# Altium PCB pcb.PcbDoc
Units mm, origin at the board's own origin, x right, y up, seen from the top; angles counter-clockwise.
Board outline 100 x 100 mm, 2 copper layers (Top Layer, Bottom Layer); 16 components, 18 nets, 108 pads, 20 vias.
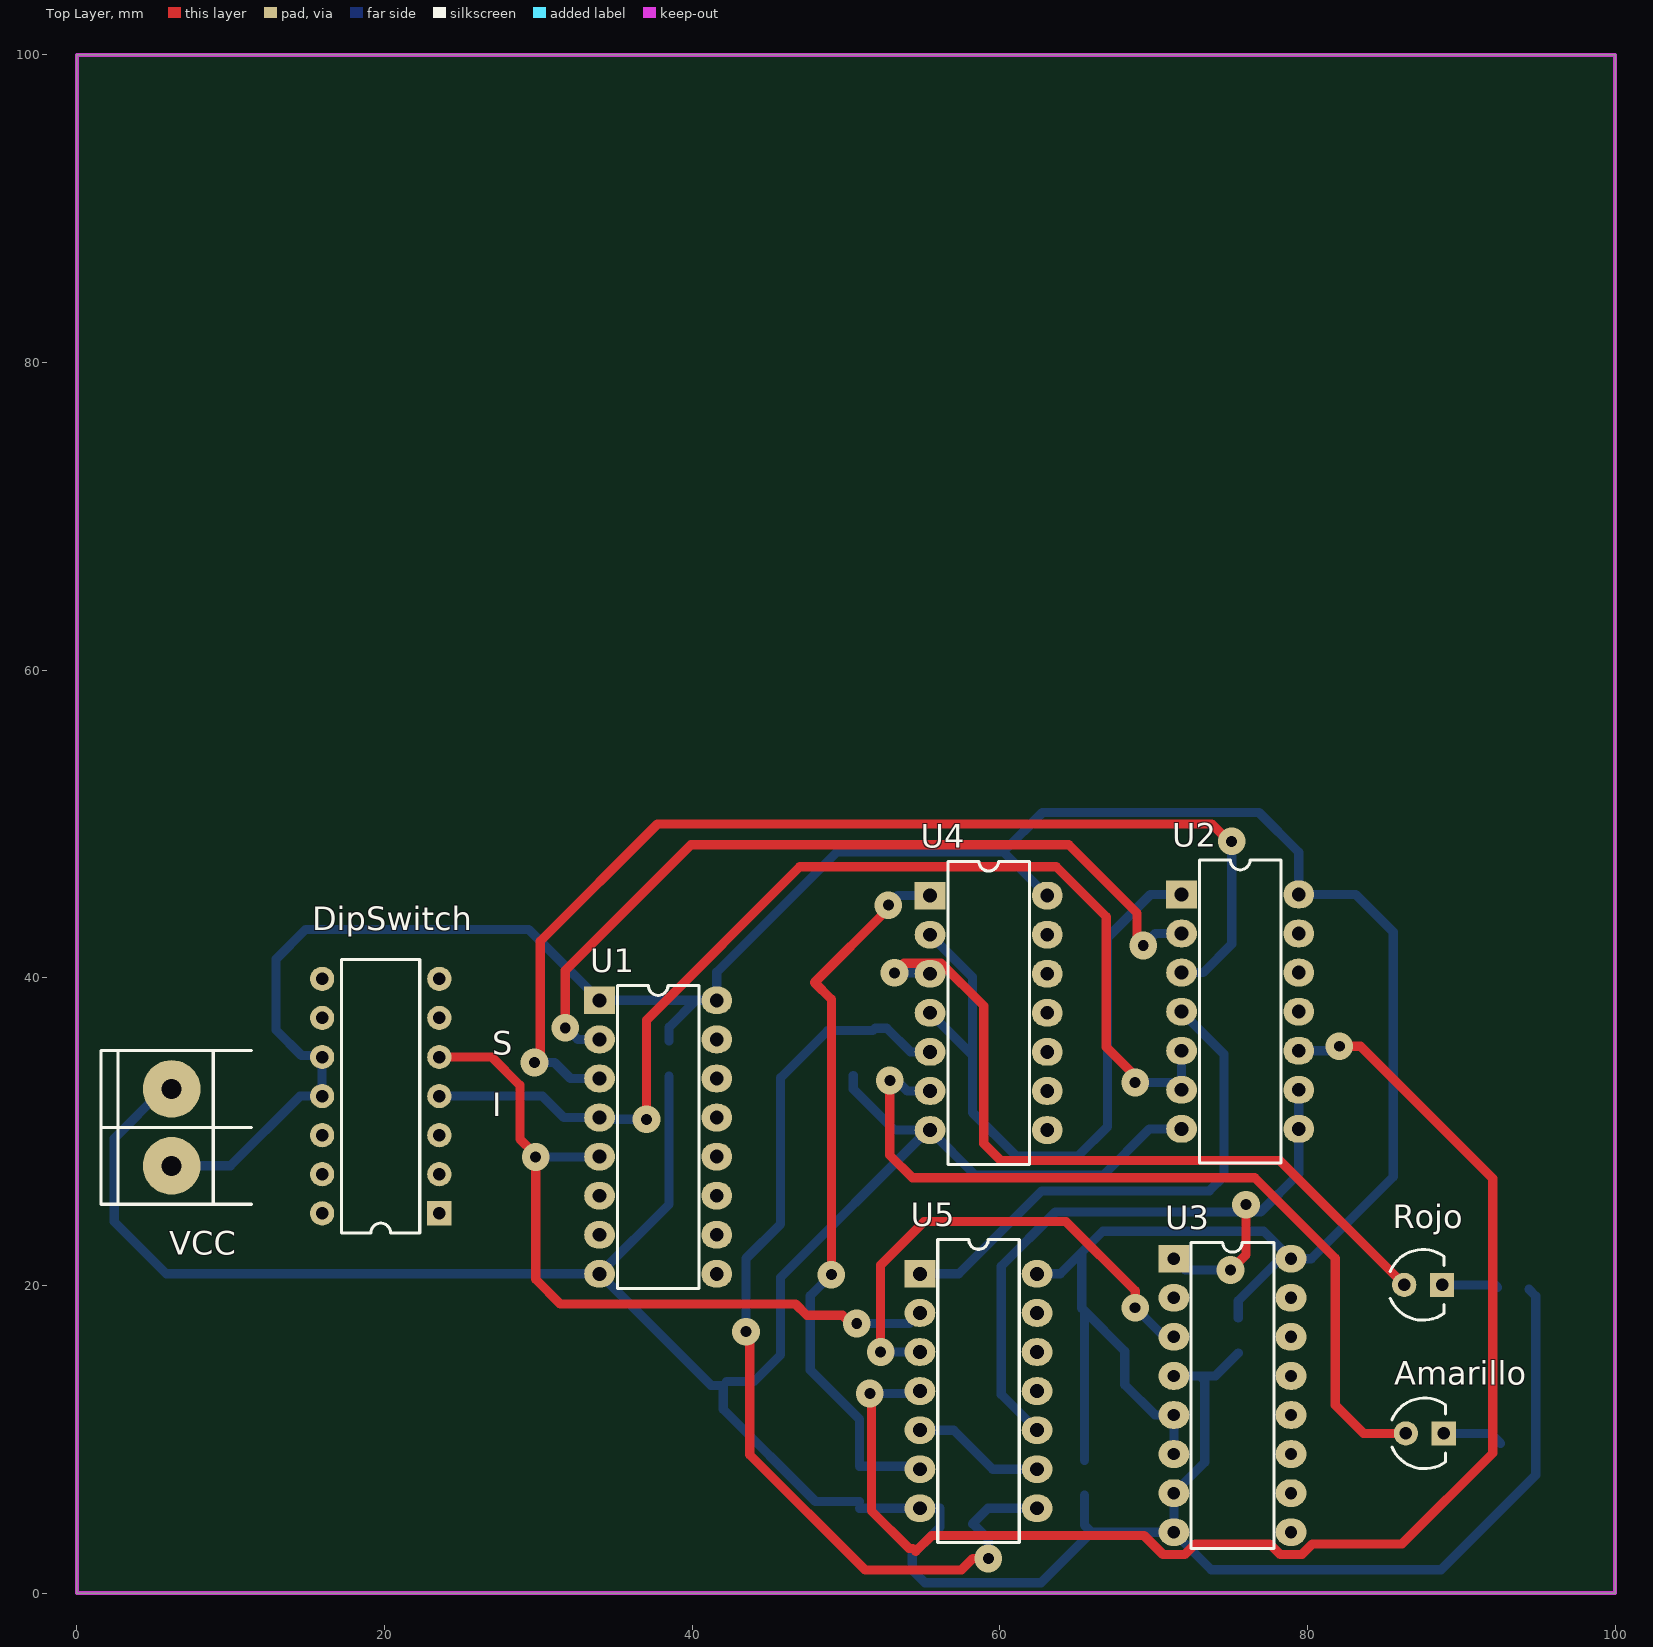
[diagram p0: Top Layer view]
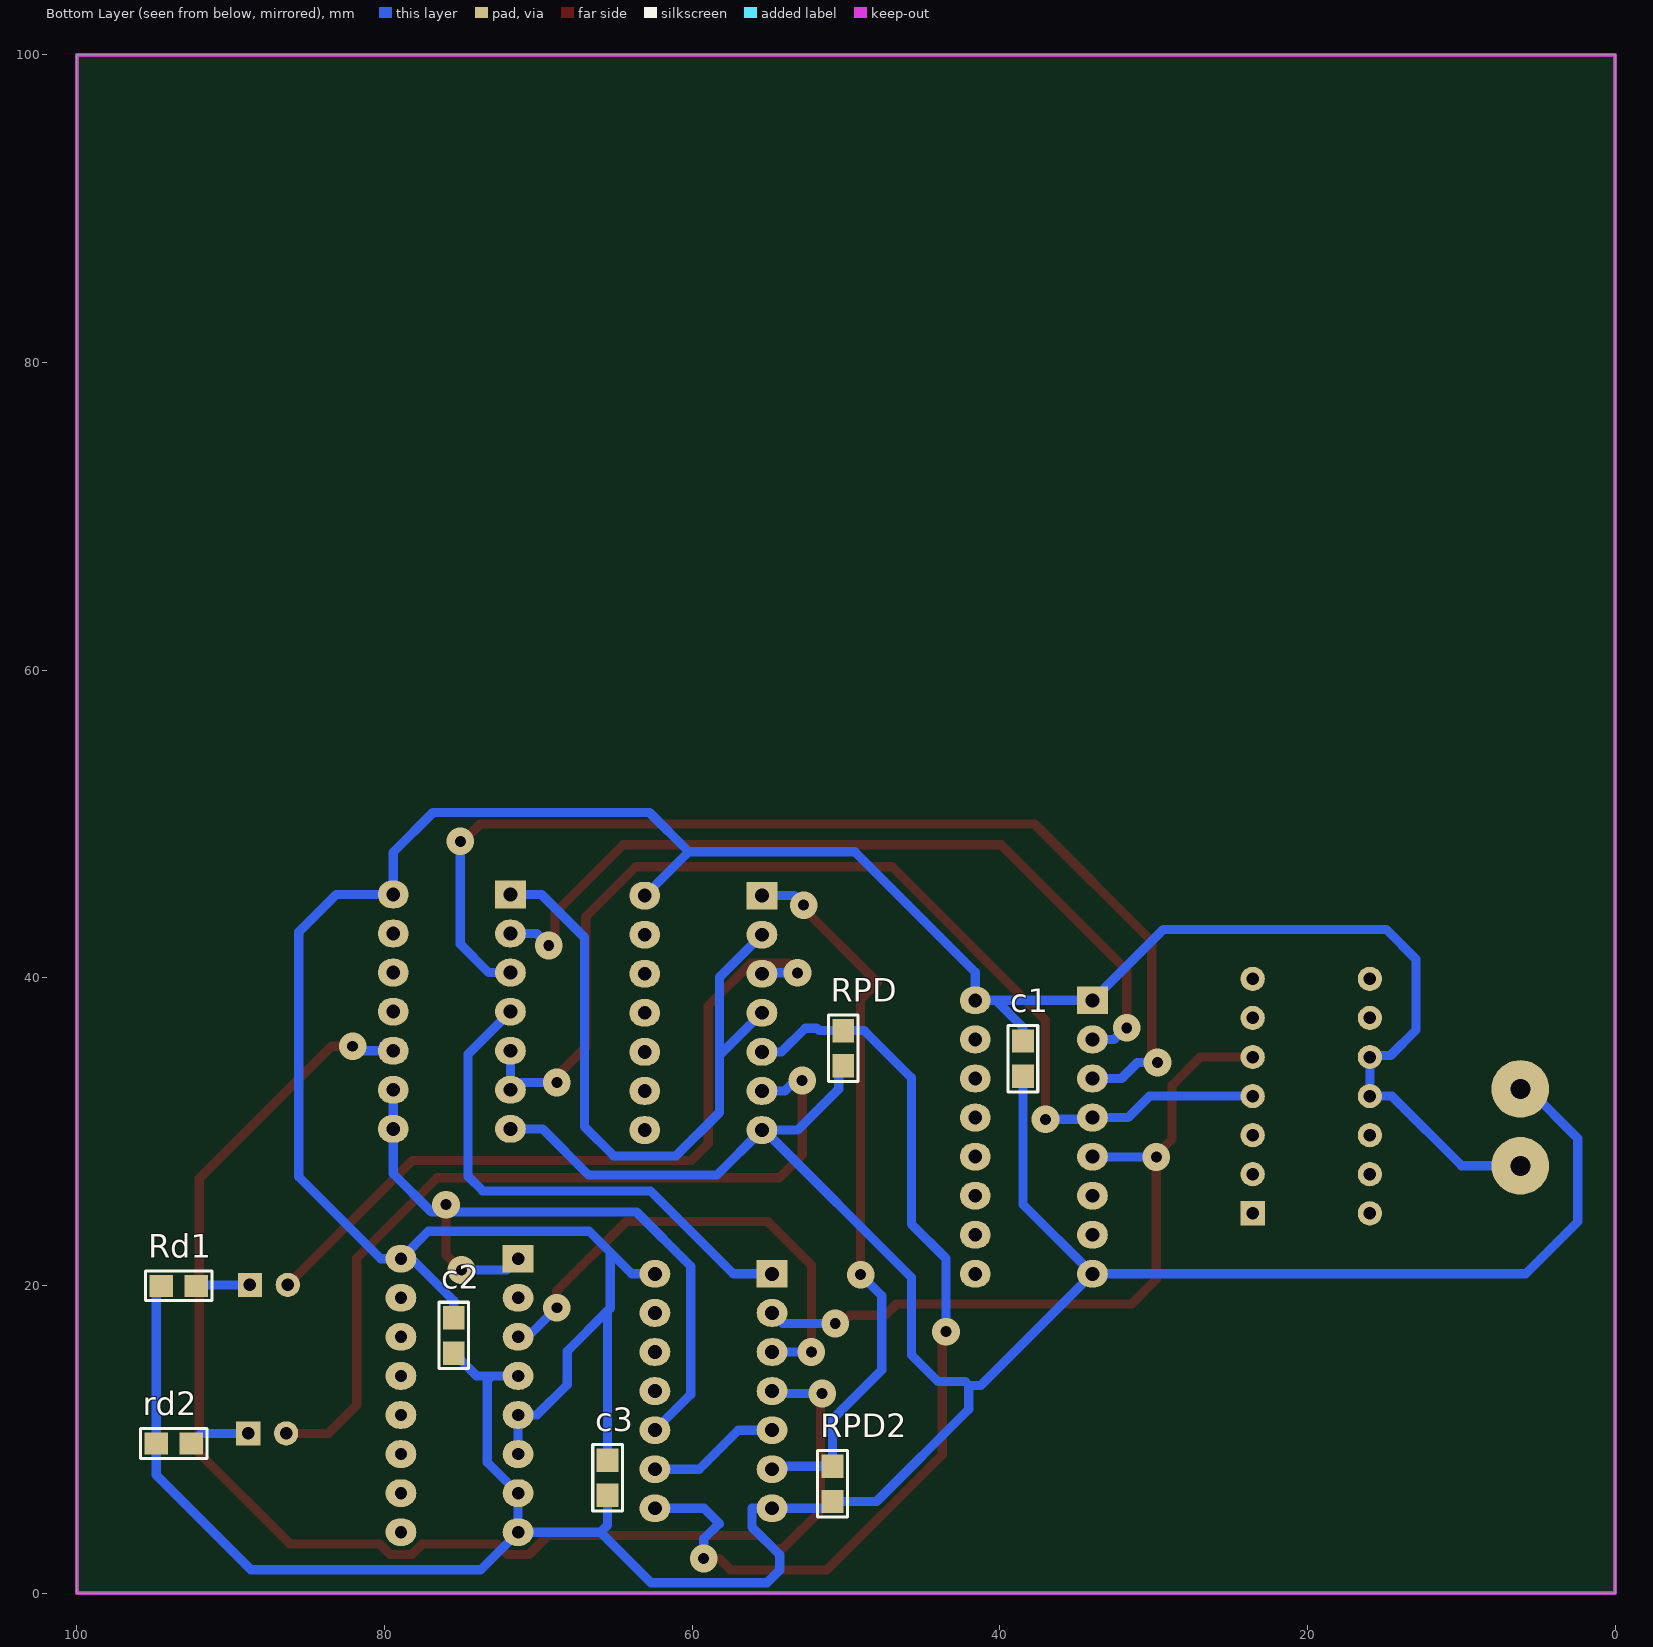
[diagram p1: Bottom Layer view, seen from below]
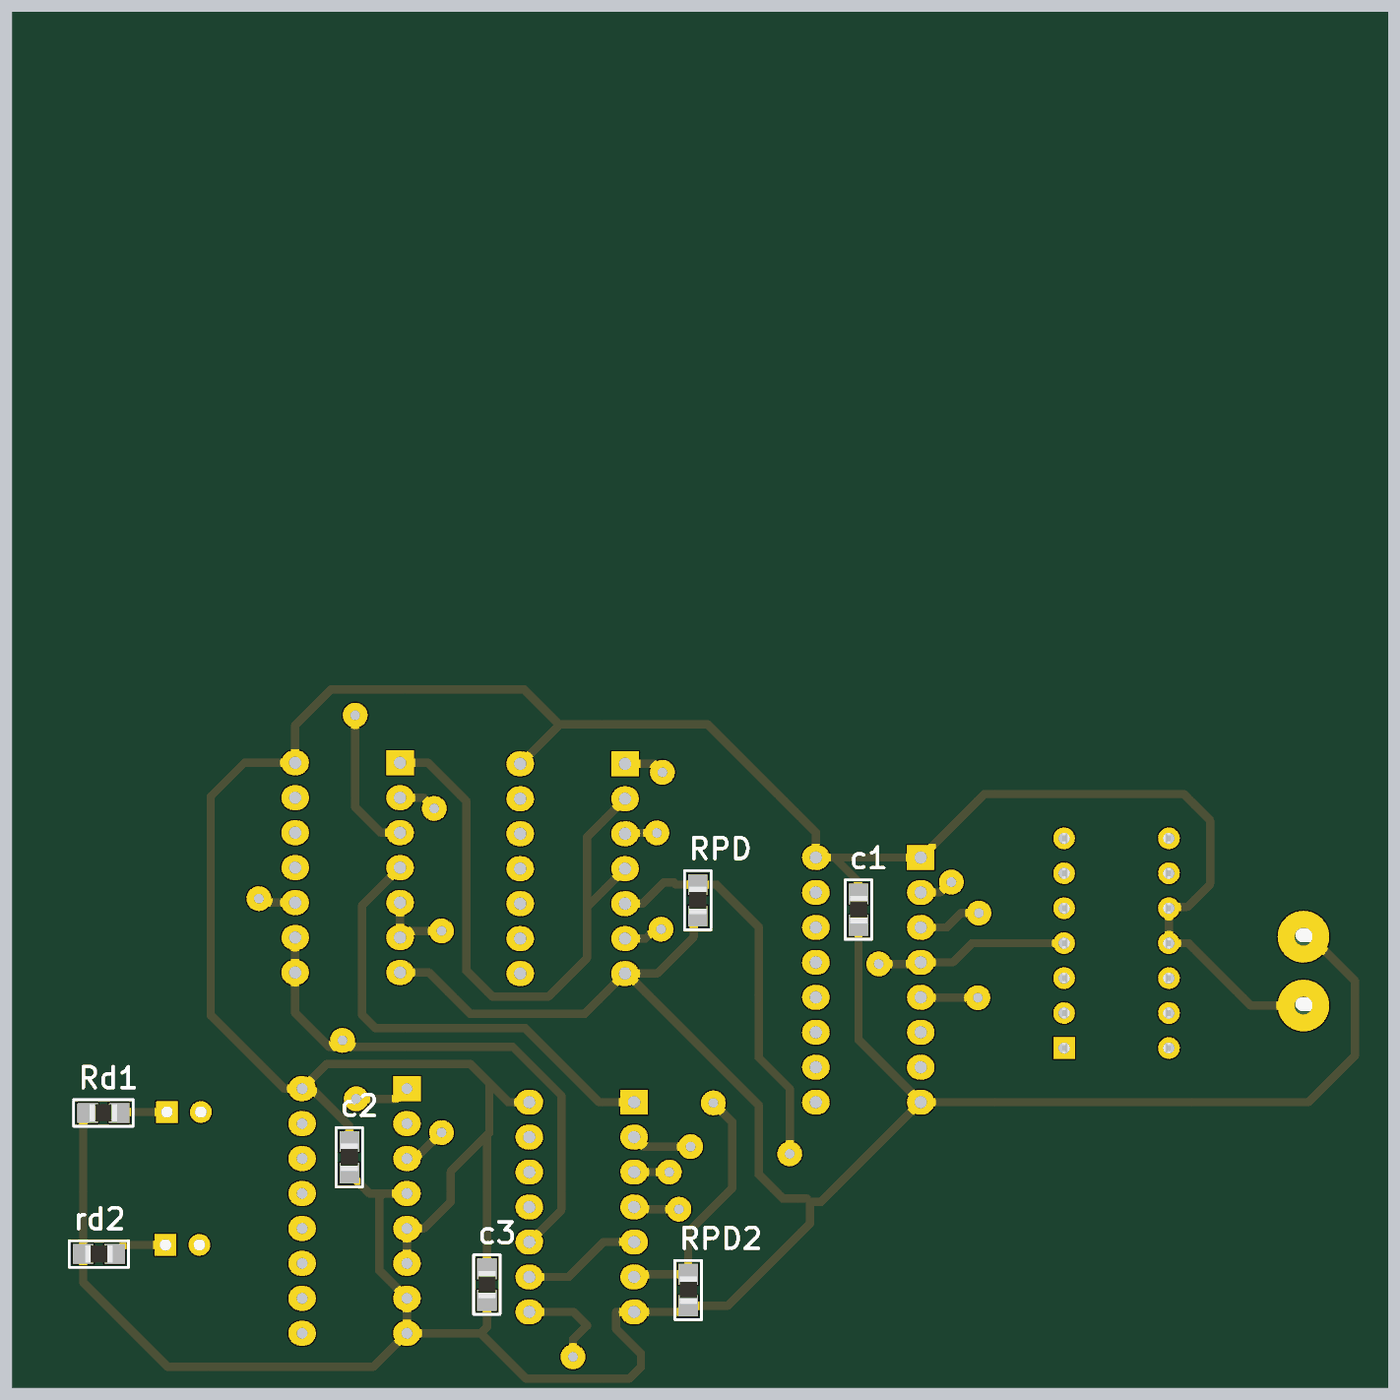
[diagram p2: 3D render of the assembled board from below, using the file's embedded part models]

## Layer stack, top to bottom
Top Solder: solder mask 0.0102, Solder Resist, Dk 3.5
Top Layer: signal copper 0.0356
Dielectric 1: dielectric 0.32, FR-4, Dk 4.8
Bottom Layer: signal copper 0.0356
Bottom Solder: solder mask 0.0102, Solder Resist, Dk 3.5

## Board outline
0,0 0,100 100,100 100,0

## Design rules (kind name [scope] priority, off if disabled: settings)
Clearance [All] p1: gap=0.254
PolygonConnect [All] p1: connectstyle=Relief reliefconductorwidth=0.254 reliefentries=4 polygonreliefangle="90 Angle" airgapwidth=0.254
RoutingVias [All] p1: holewidth=0.711 width=1.27 viastyle="Through Hole" minholewidth=0.711 minwidth=1.27 maxholewidth=0.711 maxwidth=1.27
SolderMaskExpansion [All] p1: expansion=0.102
Width [All] p1: maxlimit=0.6 minlimit=0.6 preferedwidth=0.6
30 further rules are at their usual default settings.

## Components (designator, comment, footprint, x,y, rotation, side; value= is the part's Value field where it differs from the comment)
Amarillo "LED" LED3 87.617,10.385 r0 top
c1 "CAP" 0805 38.5,34.75 r270 bottom
c2 "CAP" 0805 75.5,16.75 r270 bottom
c3 "CAP" 0805 65.5,7.5 r270 bottom
DipSwitch "CON6*2" DIP14 23.563,24.692 r180 top (schematic designator J1)
Rd1 "470" 0805 93.375,19.975 r0 bottom
rd2 "470" 0805 93.7,9.725 r0 bottom
Rojo "LED" LED3 87.51,20.039 r0 top
RPD "1K" 0805 50.175,35.425 r90 bottom
RPD2 "1K" 0805 50.875,7.1 r270 bottom
U1 "MC74HC175AN" 648-08 37.787,29.645 r270 top
U2 "MC74ACT02N" 646-06 75.625,37.8 r270 top
U3 "MC14027BCL" 620-10 75.125,12.85 r270 top
U4 "MC74AC32N" 646-06 59.275,37.725 r270 top
U5 "MC74ACT08N" 646-06 58.615,13.135 r270 top
VCC "BORNERA 2" BORNERA2 6.164,30.28 r0 top (schematic designator J2)

## Footprints (in the part's own frame and the unit in brackets; to place one, negate y for a bottom-side part, rotate by r counter-clockwise, add the part's x,y. Pads: shape width x height; smd on the part's side, far side on the other; paste and mask are expansions set on the pad)
620-10 [mm] "DIP; 16 Leads; Row Spacing 7.62 mm; Pitch 2.54 mm"
  rect 1.8x2 hole 0.8 unplated: 1(-8.89,-3.81)
  oval 1.8x2 hole 0.8 unplated: 2(-6.35,-3.81) 3(-3.81,-3.81) 4(-1.27,-3.81) 5(1.27,-3.81) 6(3.81,-3.81) 7(6.35,-3.81) 8(8.89,-3.81) 9(8.89,3.81) 10(6.35,3.81) 11(3.81,3.81) 12(1.27,3.81) 13(-1.27,3.81) 14(-3.81,3.81) 15(-6.35,3.81) 16(-8.89,3.81)
  silkscreen extent -9.95,-2.7 9.95,2.7
646-06 [mm] "DIP; 14 Leads; Row Spacing 7.62 mm; Pitch 2.54 mm"
  rect 1.8x2 hole 0.9 unplated: 1(-7.62,-3.81)
  oval 1.8x2 hole 0.9 unplated: 2(-5.08,-3.81) 3(-2.54,-3.81) 4(0,-3.81) 5(2.54,-3.81) 6(5.08,-3.81) 7(7.62,-3.81) 8(7.62,3.81) 9(5.08,3.81) 10(2.54,3.81) 11(0,3.81) 12(-2.54,3.81) 13(-5.08,3.81) 14(-7.62,3.81)
  silkscreen extent -9.85,-2.65 9.85,2.65
648-08 [mm] "DIP; 16 Leads; Row Spacing 7.62 mm; Pitch 2.54 mm"
  rect 1.8x2 hole 0.9 unplated: 1(-8.89,-3.81)
  oval 1.8x2 hole 0.9 unplated: 2(-6.35,-3.81) 3(-3.81,-3.81) 4(-1.27,-3.81) 5(1.27,-3.81) 6(3.81,-3.81) 7(6.35,-3.81) 8(8.89,-3.81) 9(8.89,3.81) 10(6.35,3.81) 11(3.81,3.81) 12(1.27,3.81) 13(-1.27,3.81) 14(-3.81,3.81) 15(-6.35,3.81) 16(-8.89,3.81)
  silkscreen extent -9.85,-2.65 9.85,2.65
0805 [mil] "Pasivo 0805"
  rect 60x56 smd: 1(-45,0) 2(45,0)
  silkscreen extent -85,-38 85,38, body extent -39,-25 39,25, height 15
BORNERA2 [mm] "Bornera con Tornillos 5mm separación"
  round 3.75 hole 1.3: 1(0,2.5) 2(0,-2.5)
  silkscreen extent -4.6,-5 5.2,5, body extent -3.76,-4.89 3.94,5.61, height 10
DIP14 [mil]
  rect 62x62 hole 32: 1(0,0)
  round 62 hole 32: 2(0,-100) 3(0,-200) 4(0,-300) 5(0,-400) 6(0,-500) 7(0,-600) 8(300,-600) 9(300,-500) 10(300,-400) 11(300,-300) 12(300,-200) 13(300,-100) 14(300,0)
  silkscreen extent 50,-650 250,50, body extent -5,-675 305,75, height 165
LED3 [mil]
  round 62 hole 32: 1(-48,0)
  rect 62x62 hole 32: 2(49,0)
  silkscreen extent -84,-90 54,90, body extent -65,-64 65,65, height 19

## Part data
Rd1 rd2 RPD RPD2: library part RES
U1: "Quad D-Type Flip-Flop with Common Clock and Reset"
U2: "Quad 2-Input NOR Gate"
U3: "Dual J-K Flip-Flop"
U4: "Quad 2-Input OR Gate"
U5: "Quad 2-Input AND Gate"

## Via types
v1: diameter 1.8, hole 0.711, Top Layer to Bottom Layer, 20 vias

## Nets (pads, with @x,y where several pads share a name; then routed paths per layer and width w, separated by ;. In a path a pad name is that pad's centre, name@x,y a point inside that pad or via, vN(x,y) a via of type N, cw(c..) or ccw(c..) an arc to the next point about the centre after c; other vN are vias at no path point)
DMUX: U5.5 U5.9 | length 8.7
  Bottom Layer w0.6: U5.5 57.005,10.595 59.545,8.055 U5.9
GND: c1.2 c2.2 c3.2 Rd1.2 rd2.2 RPD2.2 RPD.1 U1.8 U2.7 U3.4 U3.7 U3.8 U4.7 U5.7 VCC.1 | length 217.2
  Bottom Layer w0.6: VCC.1 5.655,32.78 2.425,29.55 2.425,24.15 5.82,20.755 U1.8 ; c1.2 38.5,25.278 U1.8 ; 42.25,13.75 44,13.75 45.75,15.5 45.75,20.525 U4.7@55.33,30.105 ; RPD.1@50.475,33.657 50.475,32.775 53.145,30.105 U4.7@55.33,30.105 ; RPD2.2@50.875,5.515 U5.7 56.11,5.515 56.11,4.292 54.311,2.492 54.311,1.507 55.137,0.681 62.681,0.681 65.96,3.96 ; RPD2.2 48.018,5.957 42.025,11.95 42.025,13.5 41.232,13.5 U1.8 ; c3.2 65.5,4.42 65.96,3.96 ; U3.4 73.03,14.12 ; U2.7 69.73,30.18 66.725,27.175 58.395,27.175 U4.7 U4.7@55.33,30.105 ; c2.2 74.013,14.12 73.03,14.12 ; Rd1.2@94.4,19.75 94.843,19.307 rd2.2 94.843,7.682 88.686,1.525 73.75,1.525 U3.8 ; 65.96,3.96 U3.8 ; U3.8 U3.7 73.325,8.51 73.325,13.825 73.03,14.12
I: DipSwitch.4 U1.4 U2.5 U2.6 | length 73.7
  Top Layer w0.6: v1(37.025,30.8) 37.025,37.25 47,47.225 63.675,47.225 66.925,43.975 66.925,35.5 69.15,33.275 v1@69.15,32.85
  Bottom Layer w0.6: DipSwitch.4 30.263,32.312 31.66,30.915 U1.4 34.092,30.8 v1(37.025,30.8) ; v1(68.8,33.2) 71.335,33.2 U2.6 U2.5
NetAmarillo_1: Amarillo.1 U4.6 | length 53.8
  Top Layer w0.6: v1(52.85,33.325) 52.85,28.475 54.325,27 76.575,27 81.8,21.775 81.8,12.225 83.64,10.385 Amarillo.1
  Bottom Layer w0.6: v1@53.425,33.2 53.98,32.645 U4.6
NetAmarillo_2: Amarillo.2 rd2.1 | length 4
  Bottom Layer w0.6: Amarillo.2 91.897,10.385 rd2.1
NetRd1_1: Rd1.1 Rojo.2 | length 3.7
  Bottom Layer w0.6: Rojo.2 92.186,20.039 Rd1.1@92.35,19.875
NetRojo_1: Rojo.1 U4.3 | length 49.6
  Top Layer w0.6: v1(53.15,40.325) 53.775,40.95 56.175,40.95 58.95,38.175 58.95,29.225 60.05,28.125 78.205,28.125 Rojo.1
  Bottom Layer w0.6: v1(53.15,40.325) 55.405,40.325 U4.3
NetRPD2_1: RPD2.1 U4.1 U5.6 | length 47.6
  Top Layer w0.6: v1(49.05,20.7) 49.05,38.6 47.95,39.7 v1@52.75,44.5
  Bottom Layer w0.6: v1(49.05,20.7) 47.675,19.325 47.675,14.5 50.875,11.3 RPD2.1 54.617,8.243 U5.6 ; v1(52.75,44.725) 53.37,45.345 U4.1
NetRPD_2: RPD.2 U4.5 U5.8 | length 62.9
  Top Layer w0.6: v1@43.75,16.5 43.75,9 51.25,1.5 57.5,1.5 58.25,2.25 v1(59.25,2.25)
  Bottom Layer w0.6: v1(43.5,17) 43.5,21.75 45.75,24 45.75,33.5 48.818,36.568 RPD.2 51.743,36.568 51.9,36.725 52.65,36.725 54.19,35.185 U4.5 ; v1(59.25,2.25) 59.25,3.53 58.25,4.53 58.22,4.5 59.235,5.515 U5.8
NetU1_2: U1.2 U2.2 | length 52.4
  Top Layer w0.6: v1(31.75,36.75) 31.75,40.475 39.925,48.65 64.475,48.65 68.925,44.2 v1@68.925,42.425
  Bottom Layer w0.6: v1@32.4,36.175 32.58,35.995 U1.2 ; v1(69.325,42.1) 70.105,42.88 U2.2
NetU1_3: U1.3 U2.3 | length 71.4
  Top Layer w0.6: v1@30.125,34.45 30.125,42.375 37.75,50 73.775,50 v1@74.675,49.1
  Bottom Layer w0.6: v1(29.75,34.5) 31.05,34.5 32.095,33.455 U1.3 ; U2.3 73.215,40.34 75.075,42.2 v1(75.075,48.875)
NetU2_1: U2.1 U4.2 U4.4 | length 45.6
  Bottom Layer w0.6: U4.4 58.225,34.965 ; U4.2 58.225,40.045 58.225,34.965 ; U2.1 69.795,45.42 67,42.625 67,30.325 65.1,28.425 61.05,28.425 58.225,31.25 58.225,34.965
NetU2_4: U2.4 U5.1 | length 34.2
  Bottom Layer w0.6: U5.1 57.33,20.755 62.725,26.15 73.625,26.15 74.575,27.1 74.575,35.04 U2.4
NetU2_10: U2.10 U5.4 | length 90.7
  Top Layer w0.6: v1@51.65,12.625 51.65,5.35 54.093,2.907 54.343,2.907 54.534,2.716 55.568,3.75 69.369,3.75 70.613,2.506 72.017,2.506 72.7,3.189 77.55,3.189 78.233,2.506 79.637,2.506 80.32,3.189 86.139,3.189 92.05,9.1 92.05,26.95 83.45,35.55 v1(82.075,35.55)
  Bottom Layer w0.6: v1(51.55,12.975) 54.645,12.975 U5.4 ; U2.10 82.21,35.26 v1@82.325,35.375
NetU3_3: U3.3 U5.3 | length 32.2
  Top Layer w0.6: v1(52.25,15.675) 52.25,21.325 55.075,24.15 64.3,24.15 68.8,19.65 v1(68.8,18.55)
  Bottom Layer w0.6: v1(52.25,15.675) U5.3 ; v1(68.8,18.55) 70.69,16.66 U3.3
S: DipSwitch.5 U1.5 U5.2 | length 48.5
  Top Layer w0.6: DipSwitch.5 26.973,34.852 28.8,33.025 28.8,29.525 v1@29.675,28.65 ; v1(29.825,28.35) 29.825,20.4 31.425,18.8 46.719,18.8 47.458,18.061 49.764,18.061 v1@50.75,17.075
  Bottom Layer w0.6: v1(29.825,28.35) U1.5@33.952,28.35 ; v1(50.7,17.525) 54.115,17.525
SELECTLINE: U2.8 U2.9 U3.1 U5.10 | length 47.6
  Top Layer w0.6: v1(75,21) 76,22 v1(76,25.25)
  Bottom Layer w0.6: U5.10 60.1,12.92 60.1,21.25 63.625,24.775 76.95,24.775 79.435,27.26 U2.8 U2.9 ; U3.1 72.055,21 v1(75,21)
VCC: c1.1 c2.1 c3.1 DipSwitch.10 DipSwitch.11 U1.1 U1.16 U2.14 U3.5 U3.6 U3.16 U4.14 U5.14 VCC.2 | length 190.5
  Bottom Layer w0.6: VCC.2 9.98,27.78 14.512,32.312 DipSwitch.11 DipSwitch.10 15.72,35.075 15.595,34.95 14.6,34.95 12.95,36.6 12.95,41.225 14.875,43.15 29.362,43.15 U1.1 40.25,38.535 ; c1.1 38.5,36.785 40.25,38.535 ; U5.14 63.93,20.755 65.325,22.15 ; U4.14 60.23,48.2 ; c3.1 65.5,18.35 ; U3.6 U3.5 70.095,11.58 68.125,13.55 68.125,15.725 65.5,18.35 ; c2.1 75.5,19 U3.16@78.24,21.74 ; 40.25,38.535 U1.16 41.597,40.372 49.425,48.2 60.23,48.2 ; 60.23,48.2 62.78,50.75 76.85,50.75 79.435,48.165 U2.14 83.13,45.42 85.575,42.975 85.575,27.075 80.24,21.74 U3.16 77.15,23.525 66.7,23.525 65.325,22.15 ; 65.325,22.15 65.325,18.525 65.5,18.35
pads on no net: DipSwitch.1 DipSwitch.2 DipSwitch.3 DipSwitch.6 DipSwitch.7 DipSwitch.8 DipSwitch.9 DipSwitch.12 DipSwitch.13 DipSwitch.14 U1.6 U1.7 U1.9 U1.10 U1.11 U1.12 U1.13 U1.14 U1.15 U2.11 U2.12 U2.13 U3.2 U3.9 U3.10 U3.11 U3.12 U3.13 U3.14 U3.15 U4.8 U4.9 U4.10 U4.11 U4.12 U4.13 U5.11 U5.12 U5.13

## Keep-outs
Keep-Out Layer:
  lines w0.254: 0,0 0,100 100,100 100,52 100,0 0,0

## Silkscreen, mask and mechanical layers (free items; w line width, h text height)
Top Overlay:
  text "S" at 27,35 h1.52
  text "I" at 27,31 h1.52